# Altium PCB PCB_DATN_RX_v1.PcbDoc
Units mm, origin at the board's own origin, x right, y up, seen from the top; angles counter-clockwise.
Board outline 70.3 x 45.3 mm, 2 copper layers (Top Layer, Bottom Layer); 34 components, 25 nets, 155 pads, 46 vias.
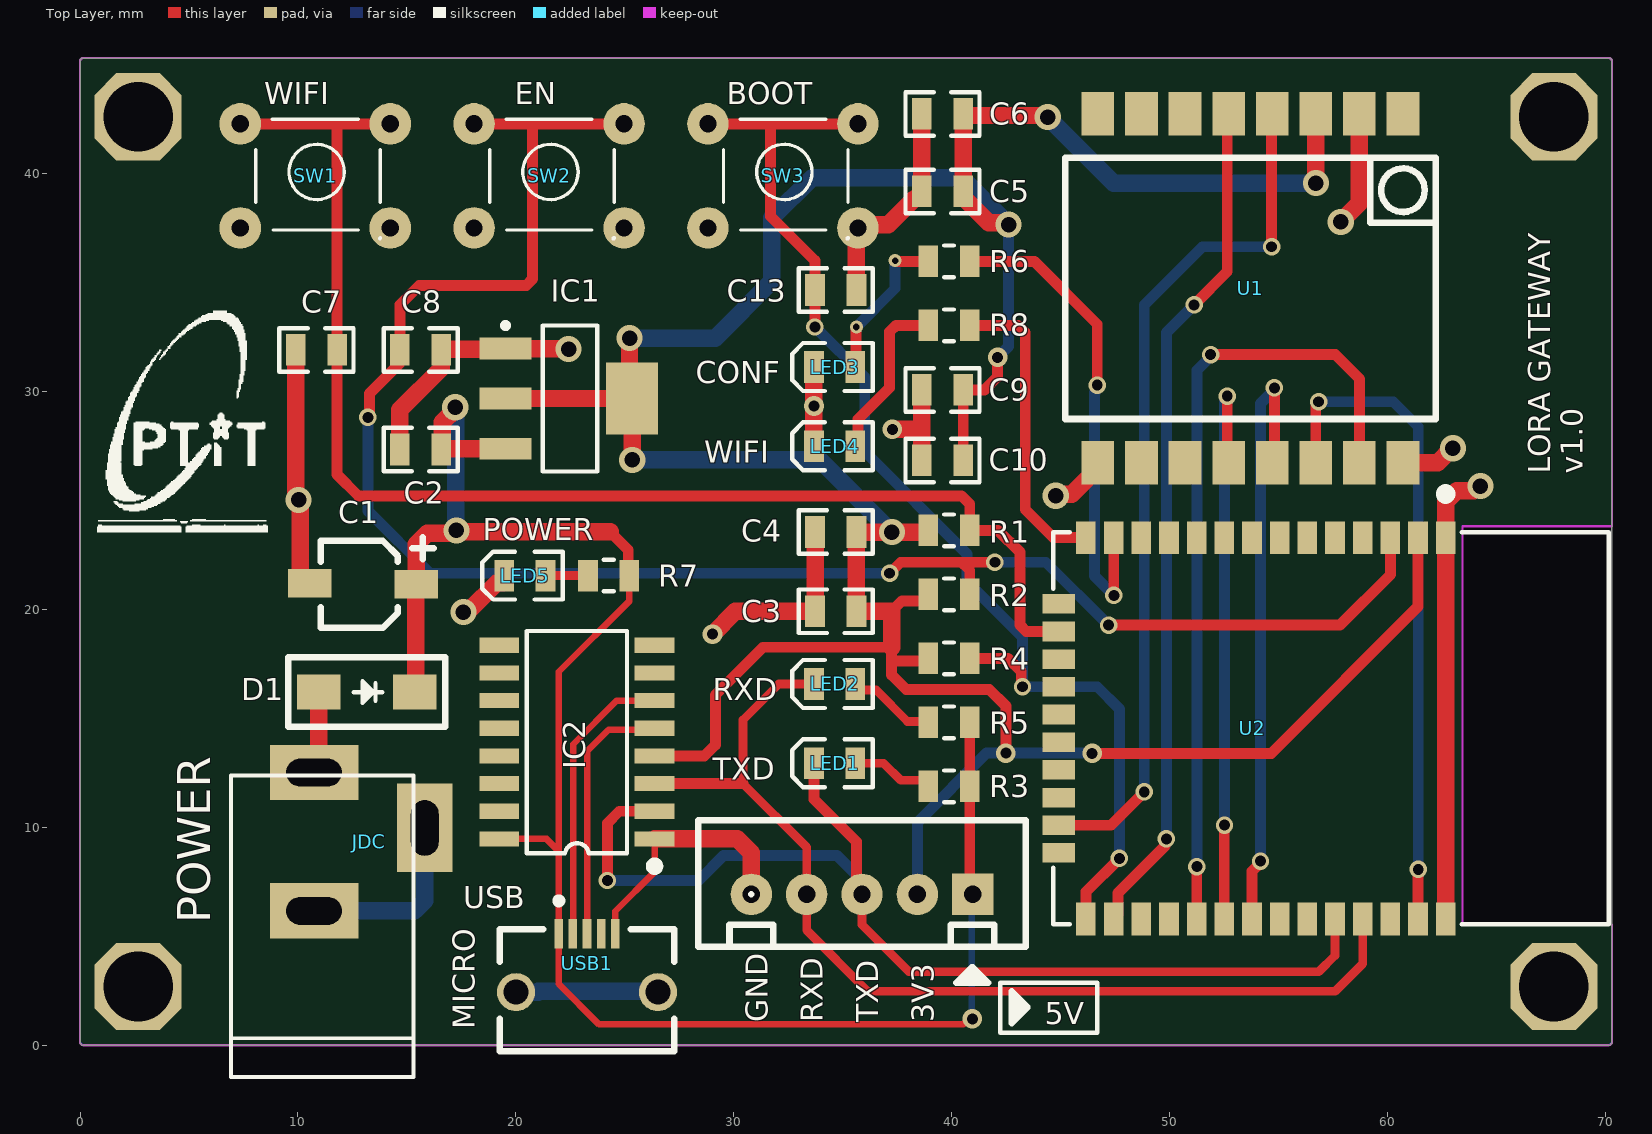
[diagram p0: Top Layer view]
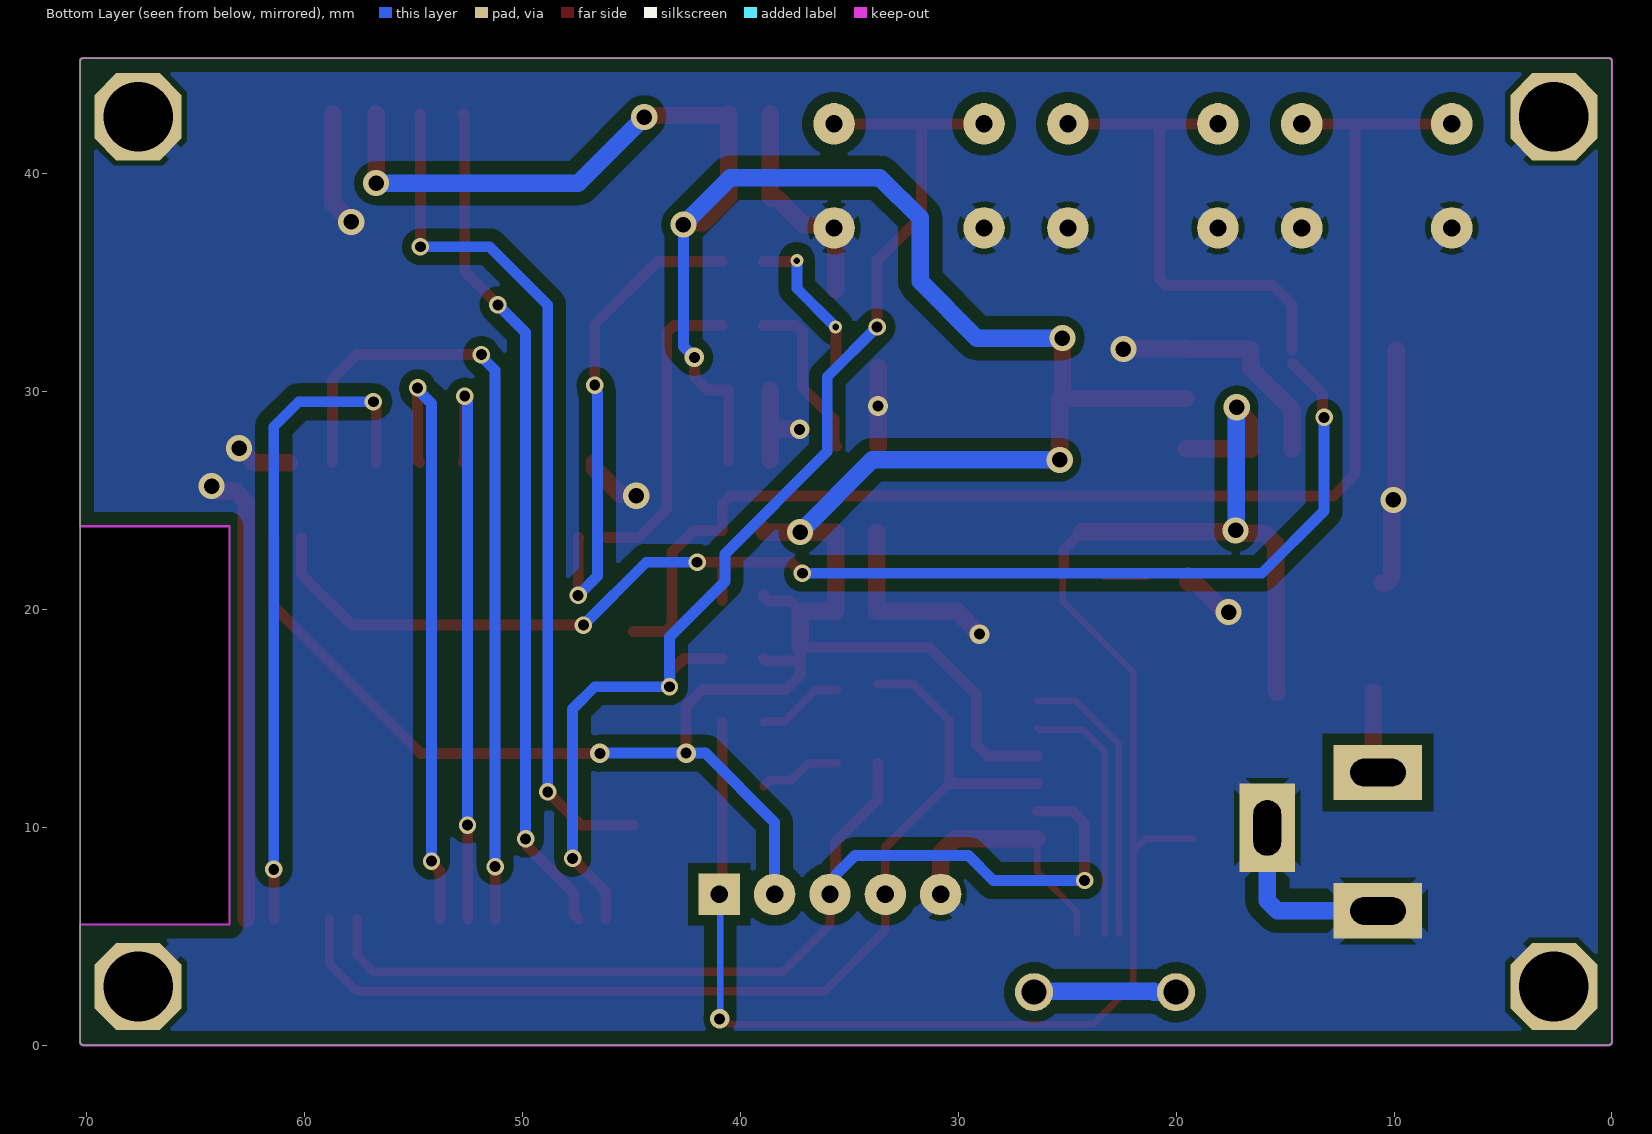
[diagram p1: Bottom Layer view, seen from below]
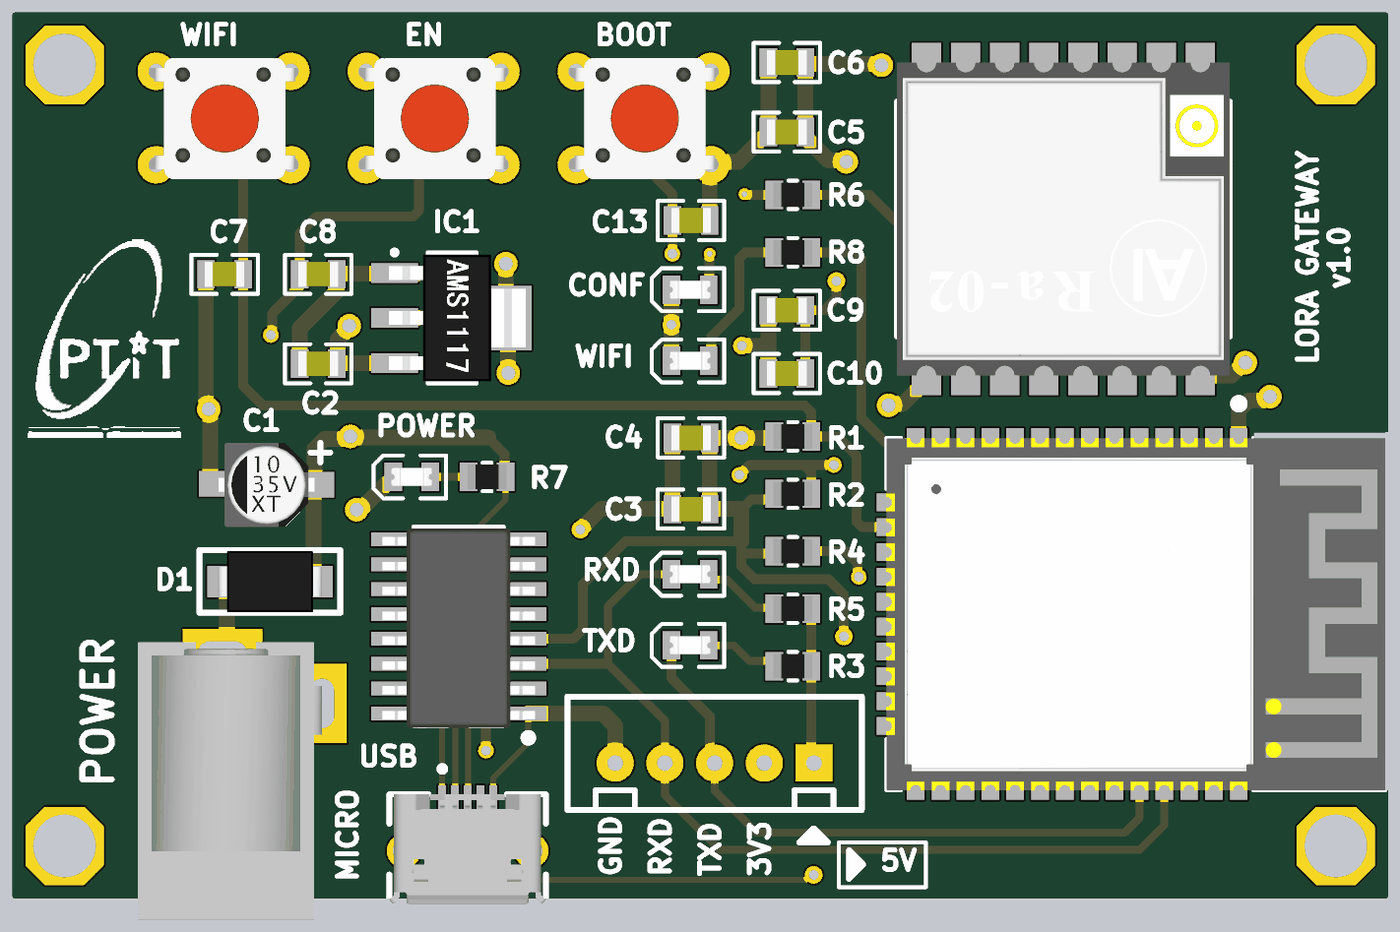
[diagram p2: 3D render of the assembled board from above, using the file's embedded part models]

## Layer stack, top to bottom
Top Solder: solder mask 0.0102, Solder Resist, Dk 3.5
Top Layer: signal copper 0.0356
Dielectric 1: dielectric 0.32, FR-4, Dk 4.8
Bottom Layer: signal copper 0.0356
Bottom Solder: solder mask 0.0102, Solder Resist, Dk 3.5

## Board outline
0,0.15 ccw(c0.15,0.15) 0.15,0 70.15,0 ccw(c70.15,0.15) 70.301,0.15 70.301,45.15 ccw(c70.15,45.15) 70.15,45.301 0.15,45.301 ccw(c0.15,45.15) 0,45.15
cut-out: 70.301,23.814 63.443,23.814 63.443,5.526 70.301,5.526

## Design rules (kind name [scope] priority, off if disabled: settings)
Clearance [All] p1: gap=0.254 ignorepadtopadclearanceinfootprint=FALSE except(0.3: SMDPad-Fill SMDPad-Poly SMDPad-Region Via-Fill Via-Poly Via-Region Fill-Fill Fill-Poly Fill-Region Poly-Poly Poly-Region Region-Region; 0.5: THPad-Fill THPad-Poly THPad-Region; 0.6: Arc-Fill Arc-Poly Arc-Region Track-Fill Track-Poly Track-Region)
DiffPairsRouting [InDifferentialPair('USB_TX')] p1: maxlimit=0.508 minlimit=0.254 mostfreqgap=0.381 toplayer_minwidth=0.3 toplayer_maxwidth=0.5 toplayer_prefwidth=0.4 bottomlayer_minwidth=0.3 bottomlayer_maxwidth=0.5 bottomlayer_prefwidth=0.4 maxuncoupledlength=12.7
PolygonConnect POLY_VIA [IsVia] p1: connectstyle=Direct reliefconductorwidth=0.254 reliefentries=4 polygonreliefangle="90 Angle" airgapwidth=0.254
PolygonConnect [All] p2: connectstyle=Relief reliefconductorwidth=0.762 reliefentries=4 polygonreliefangle="45 Angle" airgapwidth=0.254
RoutingVias VIA_POWER [InNetClass('POWER')] p1: holewidth=0.6 width=1 viastyle="Through Hole" minholewidth=0.5 minwidth=0.9 maxholewidth=0.8 maxwidth=1.2
RoutingVias [All] p2: holewidth=0.4 width=0.7 viastyle="Through Hole" minholewidth=0.3 minwidth=0.6 maxholewidth=0.5 maxwidth=0.8
SolderMaskExpansion [All] p1: expansion=0.102 istentingtop=FALSE
Width LORA [InNetClass('LORA')] p1: maxlimit=0.5 minlimit=0.3 preferedwidth=0.4
Width UART [InNetClass('UART')] p2: maxlimit=0.5 minlimit=0.3 preferedwidth=0.4
Width POWER [InNetClass('POWER')] p3: maxlimit=0.8 minlimit=0.3 preferedwidth=0.5
Width [All] p4: maxlimit=0.8 minlimit=0.4 preferedwidth=0.6
29 further rules are at their usual default settings.

## Classes and differential pairs
net class UART: RXD TXD
net class LORA: DIO0 MISO MOSI NSS RST SCLK
net class USB: USB_TX_N USB_TX_P
net class POWER: 3V3 5V GND NetD1_1
differential pair USB_TX: +USB_TX_P -USB_TX_N

## Components (designator, comment, footprint, x,y, rotation, side; value= is the part's Value field where it differs from the comment)
C1 "22uF/16V" "Cap Aluminum 4x5.4" 12.887,21.447 r0 top
C2 "100nF" "CAP SMD 0805" 14.68,27.335 r0 top value=103
C3 "100nF" "CAP SMD 0805" 33.73,19.912 r0 top value=103
C4 "10uF" "CAP SMD 0805" 33.73,23.549 r0 top value=103
C5 "100nF" "CAP SMD 0805" 38.629,39.181 r0 top value=103
C6 "10uF" "CAP SMD 0805" 38.629,42.737 r0 top value=103
C7 "100nF" "CAP SMD 0805" 9.896,31.907 r0 top value=103
C8 "100nF" "CAP SMD 0805" 16.58,31.907 r180 top value=103
C9 "100nF" "CAP SMD 0805" 38.629,30.071 r0 top value=103
C10 "10uF" "CAP SMD 0805" 38.629,26.834 r0 top value=103
C13 "100nF" "CAP SMD 0805" 35.63,34.657 r180 top value=103
D1 "Diode" "DIODE SMA" 13.151,16.194 r0 top
IC1 "AMS1117-SOT223" AMS1117-SOT223 22.029,29.875 r270 top
IC2 "CH340C" SOP-16 22.803,13.908 r180 top
JDC "JACK DC 5.5" "DC IN" 13.278,9.336 r90 top
LED1 "LED" "LED SMD 0805" 35.58,12.94 r180 top value="LED 3 ly Single Colour"
LED2 "LED" "LED SMD 0805" 35.58,16.576 r180 top value="LED 3 ly Single Colour"
LED3 "LED" "LED SMD 0805" 35.58,31.121 r180 top value="LED 3 ly Single Colour"
LED4 "LED" "LED SMD 0805" 35.58,27.485 r180 top value="LED 3 ly Single Colour"
LED5 "LED" "LED SMD 0805" 21.359,21.55 r180 top value="LED 3 ly Single Colour"
R1 "10K" "RES SMD 0805" 40.828,23.624 r180 top value=1K
R2 "10K" "RES SMD 0805" 40.828,20.687 r180 top value=1K
R3 "2K" "RES SMD 0805" 38.928,11.876 r0 top value=1K
R4 "10K" "RES SMD 0805" 40.828,17.75 r180 top value=1K
R5 "2K" "RES SMD 0805" 38.928,14.813 r0 top value=1K
R6 "1K" "RES SMD 0805" 40.828,35.971 r180 top
R7 "1K" "RES SMD 0805" 25.211,21.55 r180 top
R8 "1K" "RES SMD 0805" 40.828,33.035 r180 top
SW1 "SW 4 PIN" "SW 4 PIN TH" 10.857,40.073 r0 top
SW2 "SW 4 PIN" "SW 4 PIN TH" 21.589,40.073 r0 top
SW3 "SW 4 PIN" "SW 4 PIN TH" 32.32,40.073 r0 top
U1 "Module Ra-02" "module ra02" 60.71,42.735 r270 top
U2 "ESP32-WROOM-32" ESP32-WROOM-32 53.791,14.543 r270 top
USB1 "Micro USB" "MICRO USB CONNECTOR" 23.264,3.77 r0 top

## Footprints (in the part's own frame and the unit in brackets; to place one, negate y for a bottom-side part, rotate by r counter-clockwise, add the part's x,y. Pads: shape width x height; smd on the part's side, far side on the other; paste and mask are expansions set on the pad)
AMS1117-SOT223 [mm]
  rect 1x2.4 smd: 1(-2.1,-2.5) 2(0.2,-2.5) 3(2.5,-2.5)
  rect 3.3x2.4 smd: 4(0.2,3.3)
  silkscreen extent -3.27,-2.62 3.55,1.7, body extent -3.05,-2.8 3.45,4.2, height 1.85
"Cap Aluminum 4x5.4" [mm]
  rect 2x1.3 smd: 1(2.55,-0.3) 2(-2.35,-0.25)
  silkscreen extent -1.85,-2.3 3.35,1.85, body extent -2.35,-2.45 2.55,1.85, height 6.4
"CAP SMD 0805" [mm]
  rect 0.9x1.45 smd: 1(0,0) 2(1.9,0)
  silkscreen extent -0.75,-1 2.65,1, body extent -0.06,-0.64 1.96,0.64, height 0.61
"DC IN" [mil]
  rect 100x160 hole 50 slot 100 at 90 deg: 1(125,100) 2(-125,100)
  rect 160x100 hole 50 slot 100 at 0 deg: 3(25,-100)
  silkscreen extent -425,-80 120,250, body extent -410,-100 149,270, height 453
"DIODE SMA" [mm]
  rect 2x1.6 smd: 1(-2.19,0.01) 2(2.21,0.01)
  silkscreen extent -3.59,-1.59 3.61,1.61, body extent -2.64,-1.54 2.66,1.57, height 2.4
ESP32-WROOM-32 [mm]
  rect 1.5x0.9 smd: 1(-8.75,8.88) 2(-8.75,7.61) 3(-8.75,6.34) 4(-8.75,5.07) 5(-8.75,3.8) 6(-8.75,2.53) 7(-8.75,1.26) 8(-8.75,-0.01) 9(-8.75,-1.28) 10(-8.75,-2.55) 11(-8.75,-3.82) 12(-8.75,-5.09) 13(-8.75,-6.36) 14(-8.75,-7.63) 25(8.75,-7.63) 26(8.75,-6.36) 27(8.75,-5.09) 28(8.75,-3.82) 29(8.75,-2.55) 30(8.75,-1.28) 31(8.75,-0.01) 32(8.75,1.26) 33(8.75,2.53) 34(8.75,3.8) 35(8.75,5.07) 36(8.75,6.34) 37(8.75,7.61) 38(8.75,8.88)
  rect 0.9x1.5 smd: 15(-5.71,-8.88) 16(-4.44,-8.88) 17(-3.17,-8.88) 18(-1.9,-8.88) 19(-0.63,-8.88) 20(0.64,-8.88) 21(1.91,-8.88) 22(3.18,-8.88) 23(4.45,-8.88) 24(5.72,-8.88)
  silkscreen extent -10.95,-9.13 9,16.37, body extent -9,-9.15 9.04,16.37, height 3.15
"LED SMD 0805" [mm]
  rect 0.9x1.45 smd: 1(0,0) 2(1.9,0)
  silkscreen extent -0.8,-1.1 2.9,1.1, body extent -0.08,-0.46 1.98,0.45, height 0.85
"MICRO USB CONNECTOR" [mm]
  rect 0.4x1.35 smd: 1(-1.3,1.338) 2(-0.65,1.338) 3(0,1.338) 4(0.65,1.338) 5(1.3,1.338)
  round 1.75 hole 1.15: 6(-3.255,-1.337) 7(3.255,-1.337)
  silkscreen extent -4,-4.05 4,2.9, body extent -4,-4.05 4,1.55, height 2.68
"module ra02" [mm]
  rect 2x1.5 smd: 1(0,0) 2(0,-2) 3(0,-4) 4(0,-6) 5(0,-8) 6(0,-10) 7(0,-12) 8(0,-14) 9(16,-14) 10(16,-12) 11(16,-10) 12(16,-8) 13(16,-6) 14(16,-4) 15(16,-2) 16(16,0)
  silkscreen extent 2,-15.5 14,1.5, body extent 0,-15.5 16,1.5, height 3.2
"RES SMD 0805" [mm]
  rect 0.9x1.45 smd: 1(0,0) 2(1.9,0)
  silkscreen extent 0.72,-0.73 1.17,0.73, body extent -0.05,-0.63 1.95,0.63, height 0.58
SOP-16 [mm]
  rect 1.825x0.7 smd: 1(-3.562,4.445) 2(-3.562,3.175) 3(-3.562,1.905) 4(-3.562,0.635) 5(-3.562,-0.635) 6(-3.562,-1.905) 7(-3.562,-3.175) 8(-3.562,-4.445) 9(3.562,-4.445) 10(3.562,-3.175) 11(3.562,-1.905) 12(3.562,-0.635) 13(3.562,0.635) 14(3.562,1.905) 15(3.562,3.175) 16(3.562,4.445)
  silkscreen extent -3.76,-5.1 2.3,5.89, body extent -3.9,-5.01 3.9,5.19, height 2
"SW 4 PIN TH" [mil]
  round 75 hole 31: 1(-138,87) 2(133,-101) 3(133,87) 4(-138,-101)
  silkscreen extent -110,-120 115,95, body extent -156,-130 156,114, height 276

## Part data
C1: library part "Capacitor Polarity", "CAP ALUMINUM"
C2 C3 C5 C7 C8 C9 C13: library part CM, "CM 0805"
C4 C6 C10: library part CM, "Cap SMD"
IC1: library part AMS1117
JDC: library part "DC IN 5.5"
LED1 LED2 LED3 LED4 LED5: "LED Single colour Green and Red"
R1 R2 R3 R4 R5 R6 R7 R8: library part RM, "Resistor SMD"
U1: library part "Module Ra02"
USB1: library part "Micro USB Connector"

## Free pads (board coordinates)
  rect 1.9x1.9 hole 0.8: 1(40.964,6.923)
  round 1.9 hole 0.8: 2(38.424,6.923) 3(35.884,6.923) 4(33.344,6.923) 5(30.804,6.923)
  oct 4x4 hole 3.2: 3(2.666,2.69) 3(2.666,42.61) 3(67.634,2.69) 3(67.634,42.61)

## Via types
v1: diameter 0.8, hole 0.5, Top Layer to Bottom Layer, 22 vias
v2: diameter 1.2, hole 0.711, Top Layer to Bottom Layer, 15 vias
v3: diameter 0.9, hole 0.5, Top Layer to Bottom Layer, 7 vias
v4: diameter 0.6, hole 0.3, Top Layer to Bottom Layer, 2 vias

## Nets (pads, with @x,y where several pads share a name; then routed paths per layer and width w, separated by ;. In a path a pad name is that pad's centre, name@x,y a point inside that pad or via, vN(x,y) a via of type N, cw(c..) or ccw(c..) an arc to the next point about the centre after c; other vN are vias at no path point)
3V3: C3.2 C4.2 C5.2 C6.2 C9.2 C10.2 IC1.2 IC1.4 IC2.4 pad.2 R1.2 R2.2 R4.2 U1.3 U2.2 | length 158.3
  Top Layer w0.5: IC2.4 28.645,13.273 29.153,13.781 29.153,16.067 31.346,18.26 37.248,18.26 37.248,17.625 ; 37.248,19.912 37.728,20.392 38.728,20.392 38.928,20.592 R2.2 ; R4.2 38.803,17.625 37.248,17.625 ; C10.2 C9.2 41.506,30.071 42.107,30.672 v3(42.107,31.561) ; v3(42.488,13.4) 42.488,15.559 41.726,16.321 37.916,16.321 37.248,16.99 37.248,17.625 ; v3(46.447,13.393) 54.668,13.393 61.401,20.126 U2.2
  Top Layer w0.8: IC1.2 IC1.4 ; v2(25.216,32.45) 25.216,29.788 IC1.4 ; v2(25.343,26.862) 25.336,26.87 25.336,29.668 IC1.4 ; 37.248,18.26 37.248,19.912 C3.2 C4.2 v2(37.254,23.549) 38.878,23.549 38.928,23.599 R1.2 ; C6.2 C6.2@40.529,42.715 ; v2(42.615,37.657) 42.539,37.734 41.702,37.734 40.529,38.906 C5.2 C6.2@40.529,42.715 ; v2(44.409,42.594) 44.337,42.665 40.579,42.665 C6.2@40.529,42.715 ; U1.3 56.71,39.565 v2(56.712,39.562)
  Bottom Layer w0.5: pad.2 38.424,10.225 41.599,13.4 46.44,13.4 v3(46.447,13.393) ; v3(42.107,31.561) 42.615,32.069 v2(42.615,37.657)
  Bottom Layer w0.8: v2(25.216,32.45) 29.153,32.45 31.75,35.047 31.75,37.973 33.593,39.816 40.456,39.816 v2(42.615,37.657) ; v2(25.343,26.862) 33.94,26.862 v2(37.254,23.549) ; v2(44.409,42.594) 47.441,39.562 v2(56.712,39.562)
5V: C1.1 C2.2 D1.2 IC1.3 IC2.16 pad.1 R3.2 R5.2 R7.1 USB1.1 | length 85.6
  Top Layer w0.3: IC2.16 21.406,9.463 21.914,8.955 ; R7.1 25.211,20.38 21.964,17.133 21.964,8.955 USB1.1 21.964,2.809 23.819,0.954 40.533,0.954 40.787,1.208 v3(40.95,1.208)
  Top Layer w0.5: 24.327,23.56 25.157,22.731 25.157,21.605 R7.1 ; R5.2 R3.2 40.828,7.06 pad.1
  Top Layer w0.8: D1.2 15.399,16.242 15.399,21.109 C1.1 15.437,22.997 15.924,23.484 17.026,23.484 17.164,23.622 v2(17.272,23.622) 17.334,23.56 24.327,23.56 ; C2.2 C2.2@16.62,27.375 ; v2(17.215,29.275) 17.215,29.167 16.63,28.582 16.63,27.385 C2.2@16.62,27.375 ; IC1.3 C2.2@16.62,27.375
  Bottom Layer w0.3: v3@40.914,1.244 40.914,6.873 pad.1
  Bottom Layer w0.8: v2(17.215,29.275) 17.244,29.247 17.244,23.65 v2(17.272,23.622)
CONF: C7.2 R1.1 SW1.1 SW1.3 U2.16 | length 61.8
  Top Layer w0.5: SW1.1 11.796,42.283 ; SW1.3 11.796,42.283 ; U2.16 43.421,18.983 43.128,19.276 43.128,22.627 42.132,23.624 R1.1 40.828,24.84 40.456,25.211 12.77,25.211 11.796,26.186 11.796,42.283
DIO0: U1.5 U2.26 | length 39.1
  Top Layer w0.5: U2.26 47.631,5.993 47.631,6.978 49.797,9.144 49.797,9.406 v1(49.854,9.463) ; v1(51.124,33.974) 52.648,35.498 52.648,42.674 U1.5
  Bottom Layer w0.5: v1(49.854,9.463) 49.854,32.704 v1(51.124,33.974)
EN: C8.2 R2.1 SW2.1 SW2.3 U2.3 | length 84.1
  Top Layer w0.5: v1(13.21,28.809) 13.267,28.866 13.267,29.078 13.278,29.089 13.278,29.905 C8.2@14.68,31.307 ; C8.2 14.68,33.979 15.564,34.863 20.478,34.863 20.771,35.156 20.771,42.283 ; SW2.1 20.771,42.283 ; SW2.3 20.771,42.283 ; v1(37.154,21.655) 37.662,22.163 40.456,22.163 ; R2.1@40.828,20.412 R2.1 40.828,21.792 40.456,22.163 ; v1(41.98,22.163) 40.456,22.163 ; v1(47.2,19.281) 57.821,19.281 60.131,21.591 U2.3
  Bottom Layer w0.5: v1(13.21,28.809) 13.21,24.518 16.072,21.655 v1(37.154,21.655) ; v1(41.98,22.163) 44.317,22.163 v1(47.2,19.281)
GND: C1.2 C2.1 C3.1 C4.1 C5.1 C6.1 C7.1 C8.1 C9.1 C10.1 C13.1 IC1.1 IC2.1 JDC.2 JDC.3 LED3.2 LED4.2 LED5.2 pad.3@2.666,2.69 pad.3@2.666,42.61 pad.3@67.634,2.69 pad.3@67.634,42.61 pad.5 SW1.2 SW1.4 SW2.2 SW2.4 SW3.2 SW3.4 U1.2 U1.9 U1.16 U2.1 U2.38 USB1.5 | length 104.4
  Top Layer w0.3: USB1.5 24.564,6.144 26.365,7.945 IC2.1
  Top Layer w0.8: C7.1 9.896,25.264 10.033,25.127 v2(10.033,25.019) 10.11,24.942 10.11,21.447 10.36,21.197 C1.2 ; C2.1 14.68,29.153 16.58,31.053 C8.1 16.614,31.941 19.495,31.941 IC1.1 19.545,31.959 22.406,31.959 v2(22.422,31.942) ; v2(17.596,19.877) 17.673,19.954 17.863,19.954 19.134,21.225 19.409,21.225 19.459,21.275 LED5.2 ; IC2.1 30.169,9.463 30.804,8.828 pad.5 ; v3(29.026,18.861) 30.077,19.912 C3.1 C4.1 ; LED4.2 v3(33.68,29.333) LED3.2 ; C13.1 35.63,37.439 35.842,37.651 37.099,37.651 38.304,38.856 38.579,38.856 38.629,38.906 C6.1 ; v3(37.281,28.259) 38.629,28.259 ; C10.1 38.629,28.259 ; C9.1 38.629,28.259 ; v2(44.774,25.211) 44.851,25.288 45.512,25.288 46.71,26.485 U1.9 ; v2(57.855,37.784) 58.71,38.639 U1.2 ; U1.16 62.3,26.735 62.935,27.37 62.986,27.37 v2(63.006,27.391) ; U2.38 62.671,24.947 63.174,25.45 63.95,25.45 64.154,25.654 v2(64.262,25.654)
  Bottom Layer w0.8: JDC.2 15.35,6.161 15.818,6.63 JDC.3
  Bottom Layer w1: JDC.3@15.691,9.844 JDC.3
IO0: C13.2 R4.1 SW3.1 SW3.3 U2.25 | length 56
  Top Layer w0.5: SW3.1 31.566,42.283 ; v1(33.725,32.958) 33.73,32.963 C13.2 33.73,36.001 31.693,38.038 31.693,42.156 31.566,42.283 ; SW3.3 31.566,42.283 ; R4.1 42.584,17.75 43.193,17.141 43.193,16.506 v1(43.25,16.448) ; U2.25 46.161,7.04 v1(47.695,8.574)
  Bottom Layer w0.5: v1(33.725,32.958) 36.011,30.672 36.011,27.243 40.71,22.544 40.71,21.274 43.25,18.734 v1(43.25,16.448) 46.679,16.448 47.695,15.432 v1(47.695,8.574)
LED_CONF: R6.1 U2.13 | length 22.6
  Top Layer w0.5: R6.1 43.793,35.971 46.679,33.085 v1(46.679,30.291) ; U2.13 47.436,23.288 47.436,20.644 v1(47.441,20.639)
  Bottom Layer w0.5: v1(46.679,30.291) 46.622,30.234 46.622,30.022 46.552,29.952 46.552,21.528 v1(47.441,20.639)
LED_WF: R8.1 U2.14 | length 14.1
  Top Layer w0.5: R8.1 43.047,33.035 43.377,32.704 43.377,24.576 44.66,23.293 U2.14
MISO: U1.13 U2.31 | length 28.3
  Top Layer w0.5: U2.31 53.786,5.798 53.786,7.98 54.172,8.366 v1(54.172,8.447) ; U1.13 54.807,26.833 v1(54.807,30.164)
  Bottom Layer w0.5: v1(54.172,8.447) 54.172,29.448 54.807,30.083 v1(54.807,30.164)
MOSI: U1.14 U2.37 | length 30.5
  Top Layer w0.5: U1.14 56.71,29.319 56.839,29.448 v1(56.839,29.529) ; U2.37 61.406,5.798 61.406,8.061 v1(61.411,8.066)
  Bottom Layer w0.5: v1(56.839,29.529) 60.264,29.529 61.411,28.382 61.411,27.751 v1(61.411,8.066)
NetD1_1: D1.1 JDC.1 | length 3.8
  Top Layer w0.8: JDC.1 10.961,12.734 D1.1
NetLED1_1: LED1.1 R3.1 | length 3.8
  Top Layer w0.4: LED1.1 36.874,12.94 37.662,12.151 38.678,12.151 38.928,11.901 R3.1
NetLED2_1: LED2.1 R5.1 | length 4
  Top Layer w0.4: LED2.1@35.585,16.297 36.535,16.297 37.976,14.856 38.885,14.856 R5.1
NetLED3_1: LED3.1 R6.2 | length 7.5
  Top Layer w0.5: LED3.1@35.58,31.396 LED3.1 35.611,31.152 35.611,32.939 v4(35.63,32.958) ; v4(37.408,36.006) 37.435,36.006 37.47,35.971 R6.2
  Bottom Layer w0.5: v4(35.63,32.958) 37.408,34.736 v4(37.408,36.006)
NetLED4_1: LED4.1 R8.2 | length 7.8
  Top Layer w0.5: LED4.1 35.709,27.613 35.709,28.724 37.154,30.169 37.154,32.742 37.447,33.035 R8.2
NetLED5_1: LED5.1 R7.2 | length 2
  Top Layer w0.4: LED5.1 R7.2
NetUSB1_6: USB1.6 USB1.7 | length 7.3
  Top Layer w0.6: USB1.6 20.217,2.432 20.39,2.605 20.39,2.583 USB1.6@20.541,2.432
  Bottom Layer w0.8: USB1.6 21.025,2.432 21.025,2.478 26.519,2.478 USB1.7
NSS: U1.15 U2.29 | length 37.3
  Top Layer w0.5: U2.29 51.246,5.798 51.246,8.188 v1(51.251,8.193) ; v1(51.886,31.688) 57.601,31.688 58.71,30.58 U1.15
  Bottom Layer w0.5: v1(51.251,8.193) 51.251,30.972 51.886,31.607 v1(51.886,31.688)
RST: U1.4 U2.23 | length 40
  Top Layer w0.5: U2.23 47.309,10.093 v1(48.838,11.622) ; v1(54.68,36.641) 54.68,42.706 U1.4
  Bottom Layer w0.5: v1(48.838,11.622) 48.838,33.974 51.505,36.641 v1(54.68,36.641)
RXD: IC2.3 LED2.2 pad.4 U2.35 | length 48.1
  Top Layer w0.4: LED2.2 32.075,16.576 30.423,14.924 30.423,12.003 33.344,9.082 pad.4 33.344,5.272 36.138,2.478 57.601,2.478 58.861,3.738 U2.35
  Top Layer w0.5: IC2.3 30.423,12.003
SCLK: U1.12 U2.30 | length 27.1
  Top Layer w0.5: U2.30 52.511,10.088 v1(52.521,10.098) ; v1(52.648,29.783) 52.648,26.797 U1.12
  Bottom Layer w0.5: v1(52.521,10.098) 52.521,29.575 52.648,29.702 v1(52.648,29.783)
TXD: IC2.2 LED1.2 pad.3@35.884,6.923 U2.34 | length 51.2
  Top Layer w0.4: pad.3@35.884,6.923 35.884,5.526 38.043,3.367 56.839,3.367 57.591,4.119 U2.34
  Top Layer w0.5: v1(24.2,7.558) 24.2,10.186 24.747,10.733 IC2.2 ; LED1.2 33.68,11.286 35.63,9.336 35.63,7.177 pad.3@35.884,6.923
  Bottom Layer w0.5: v1(24.2,7.558) 28.391,7.558 29.534,8.701 34.741,8.701 35.617,7.826 35.617,7.191 pad.3@35.884,6.923
USB_TX_N: IC2.6 USB1.2 | length 13.3
  Top Layer w0.3: USB1.2 22.614,5.617 22.63,5.632 22.63,13.809 24.634,15.813 IC2.6
USB_TX_P: IC2.5 USB1.3 | length 11.9
  Top Layer w0.3: USB1.3 23.28,5.123 23.28,13.496 24.255,14.471 26.293,14.471 IC2.5
pads on no net: IC2.7 IC2.8 IC2.9 IC2.10 IC2.11 IC2.12 IC2.13 IC2.14 IC2.15 U1.1 U1.6 U1.7 U1.8 U1.10 U1.11 U2.4 U2.5 U2.6 U2.7 U2.8 U2.9 U2.10 U2.11 U2.12 U2.15 U2.17 U2.18 U2.19 U2.20 U2.21 U2.22 U2.24 U2.27 U2.28 U2.32 U2.33 U2.36 USB1.4

## Polygon pours and split planes (outlines as drawn)
GND on Bottom Layer "GND_L02_P000" (solid, remove dead copper, pour order 0): 0,45.15 0,0.15 70.15,0.15 70.15,45.301

## Keep-outs
Keep-Out Layer:
  lines w0.1: 70.301,5.526 70.301,0.15 ; 70.301,5.543 63.443,5.543 63.443,23.814 70.301,23.814 70.301,45.15 ; 0,45.15 cw(c0.15,45.15) 0.15,45.301 ; 0,45.15 cw(c0.15,45.15) 0.15,45.301 ; 0,45.15 0,0.15 ccw(c0.15,0.15) 0.15,0 70.15,0 ; 0.15,45.301 70.15,45.301 ; 0.15,45.301 70.15,45.301 ; 70.15,0 ccw(c70.15,0.15) 70.301,0.15 ; 70.15,0 ccw(c70.15,0.15) 70.301,0.15 ; 70.15,45.301 cw(c70.15,45.15) 70.301,45.15 ; 70.15,45.301 cw(c70.15,45.15) 70.301,45.15 ; 70.301,0.15 70.301,0.15 ; 70.301,45.15 70.301,45.15

## Silkscreen, mask and mechanical layers (free items; w line width, h text height)
Top Overlay:
  drawing of 1063 lines, arcs and shapes, not listed
  text "WIFI" at 8.461,43.172 h1
  text "EN" at 19.942,43.172 h1
  text "BOOT" at 29.674,43.172 h1
  text "CONF" at 28.264,30.371 h1
  text "WIFI" at 28.645,26.735 h1
  text "LORA GATEWAY / v1.0" at 68.96,26.226 h1 r90
  text "POWER" at 18.485,23.179 h1
  text "RXD" at 29.026,15.826 h1
  text "TXD" at 29.026,12.19 h1
  text "USB" at 17.596,6.288 h1
  text "POWER" at 5.969,5.588 h1.5 r90
  text "GND" at 31.554,1.059 h1 r90
  text "RXD" at 34.094,1.059 h1 r90
  text "TXD" at 36.634,1.059 h1 r90
  text "3V3" at 39.174,1.059 h1 r90
  text "5V" at 44.266,0.967 h1
  text "MICRO" at 18.104,0.741 h1 r90
Top TOP-BOT:
  circle w0.05: c33.344,6.923 r0.95
  circle w0.05: c35.884,6.923 r0.95
  circle w0.05: c38.424,6.923 r0.95
  circle w0.05: c30.804,6.923 r0.95
  lines w0.05: 40.004,5.973 40.004,7.873 41.904,7.873 41.904,5.973 40.004,5.973